# Altium PCB PCB1.PcbDoc
Units mil, origin at the board's own origin, x right, y up, seen from the top; angles counter-clockwise.
Board outline 6000 x 4465 mil, 2 copper layers (Top Layer, Bottom Layer); 52 components, 40 nets, 184 pads, 0 vias.
Unrouted connection lines stored in the file: 5.
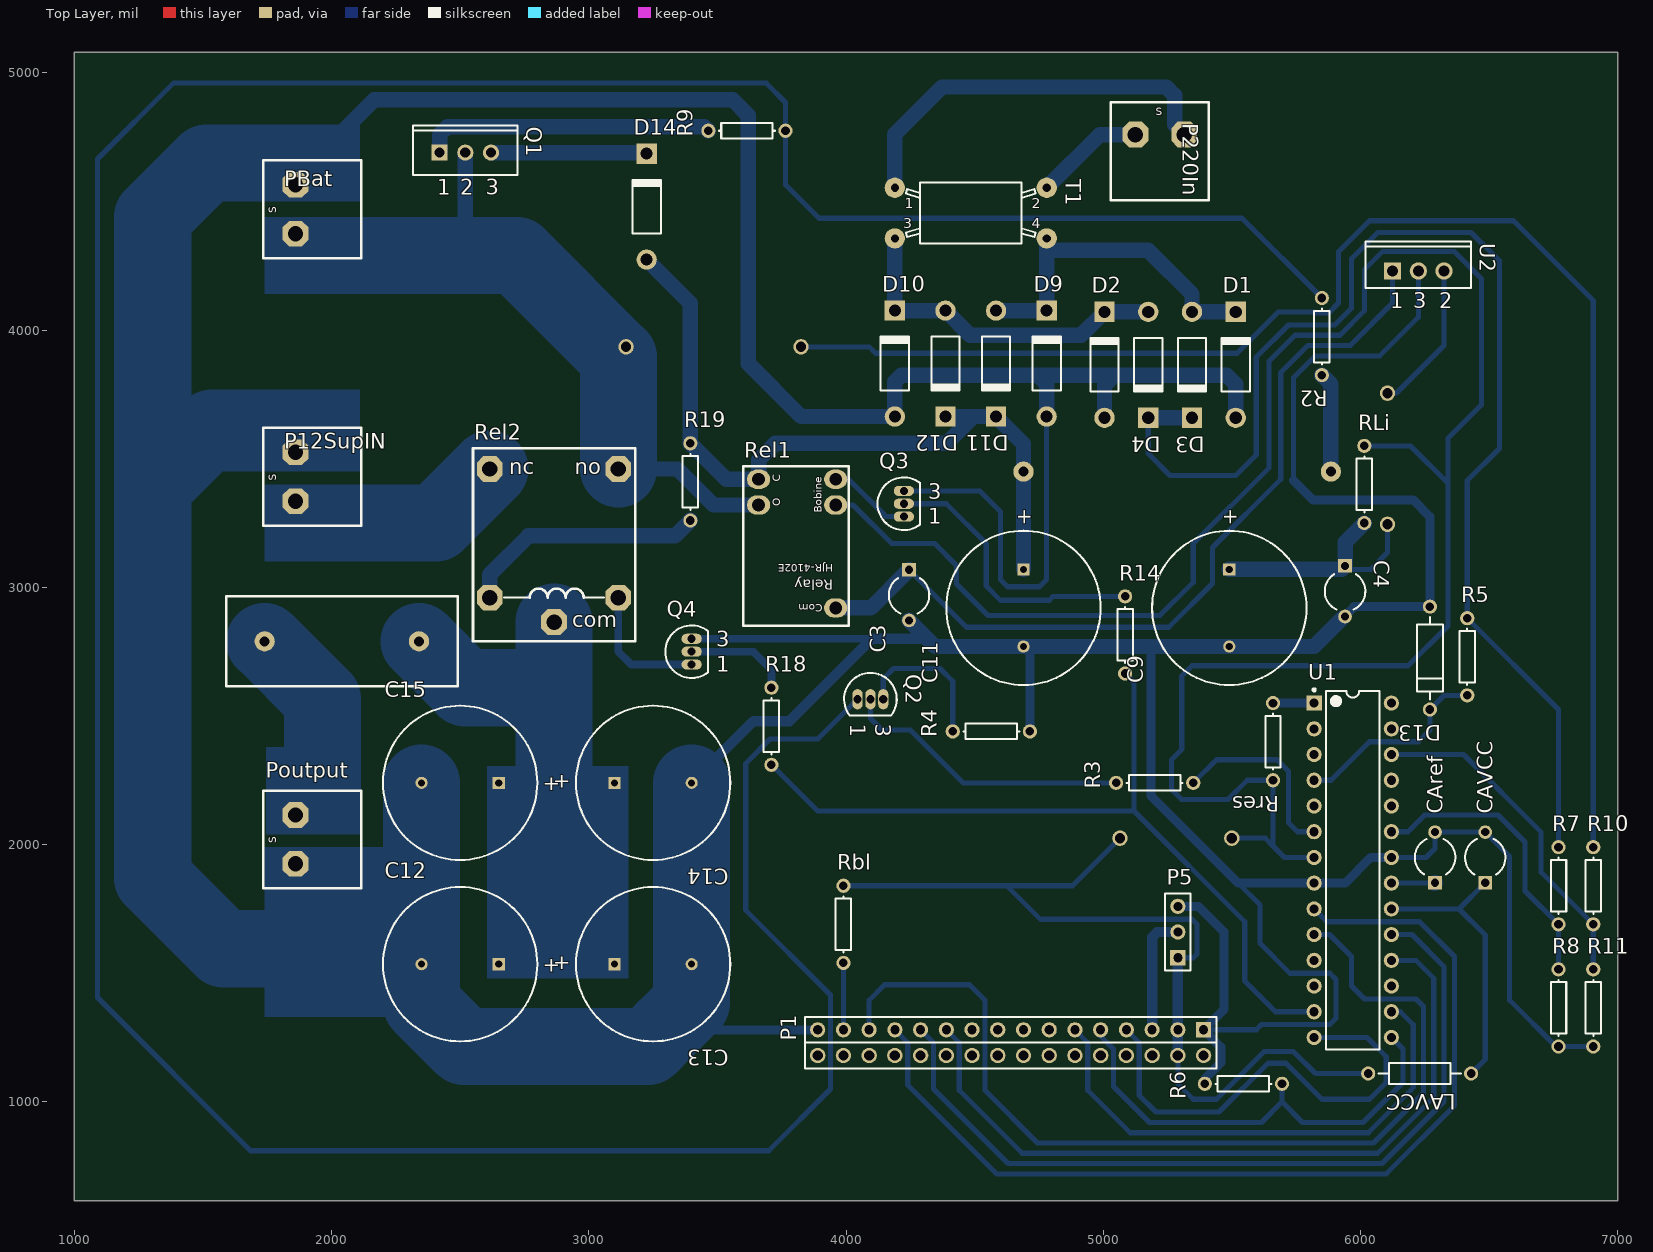
[diagram p0: Top Layer view]
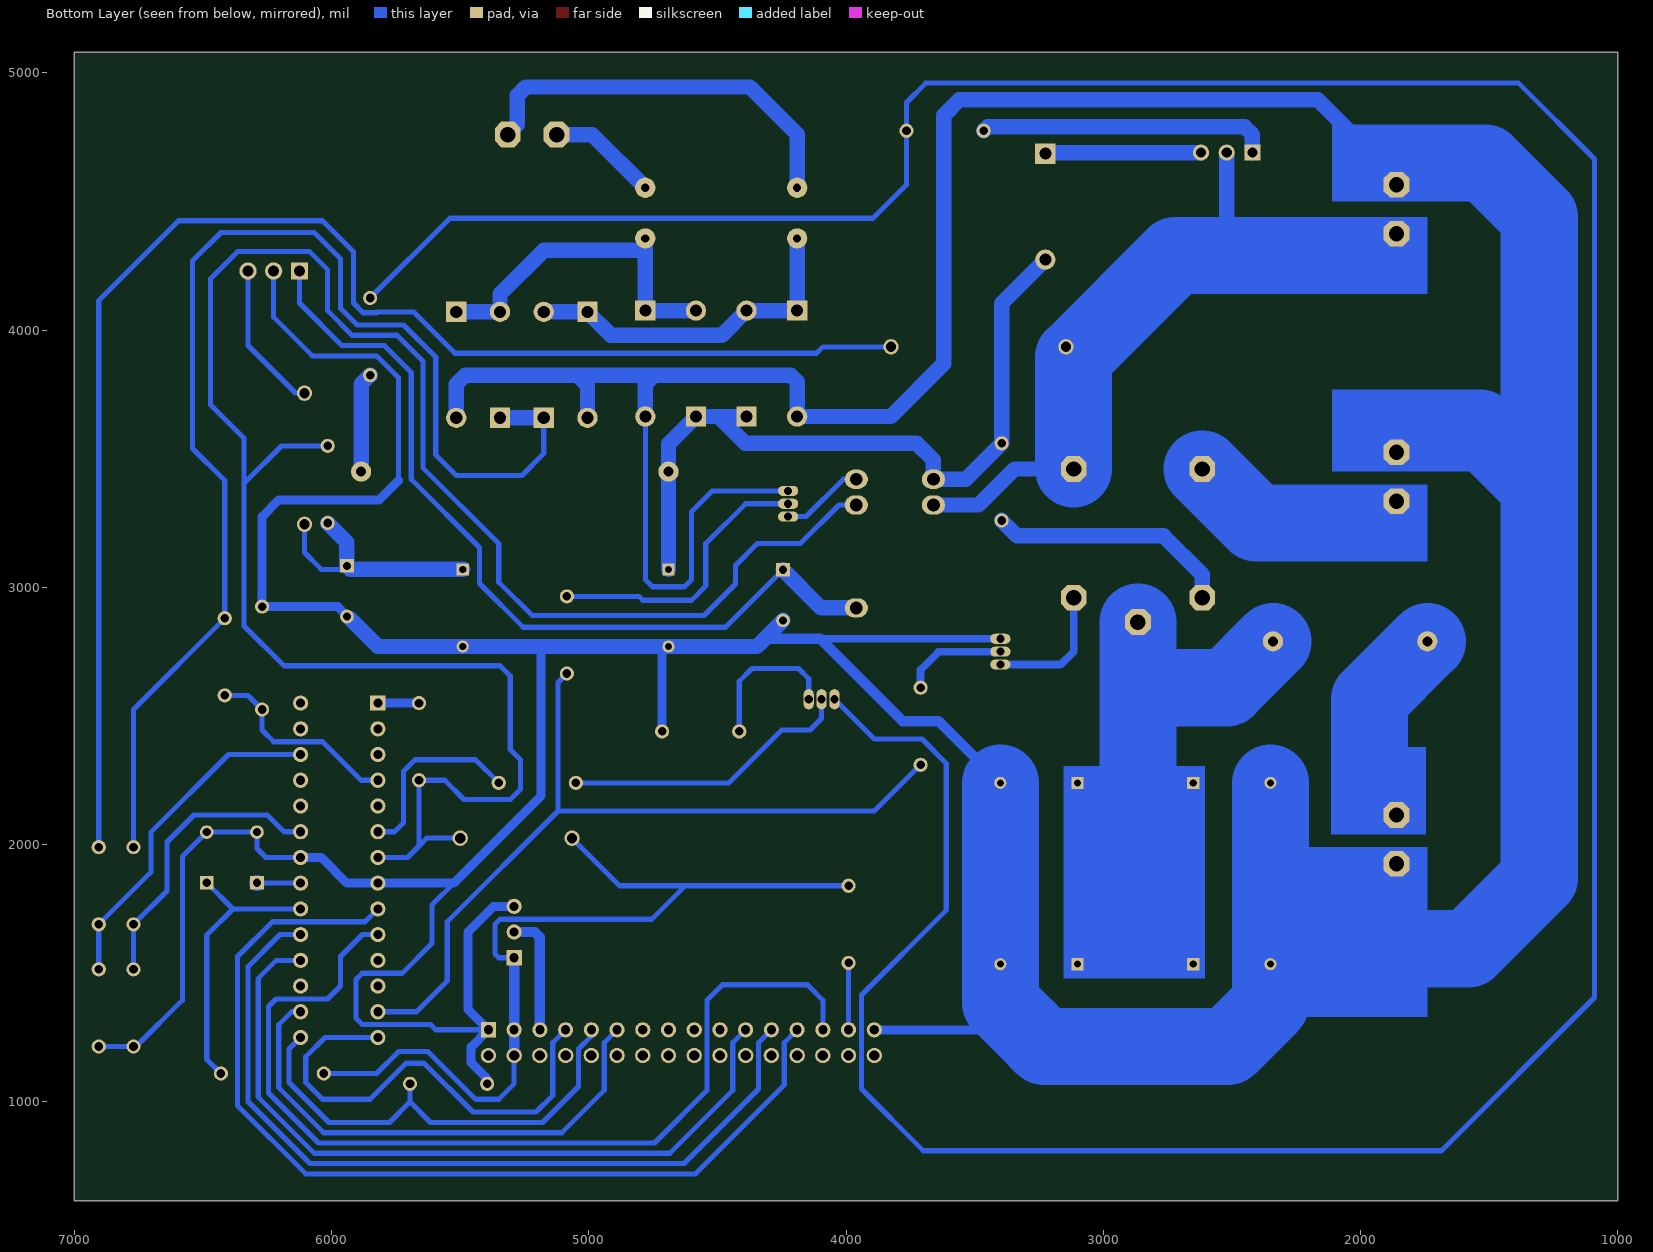
[diagram p1: Bottom Layer view, seen from below]

## Layer stack, top to bottom
Top Layer: signal copper 1.4
Dielectric: dielectric 12.6, FR-4, Dk 4.8
Bottom Layer: signal copper 1.4

## Board outline
1000,615 7000,615 7000,5080 1000,5080

## Design rules (kind name [scope] priority, off if disabled: settings)
Clearance [All] p1: gap=10
PolygonConnect [All] p1: connectstyle=Relief reliefconductorwidth=10 reliefentries=4 polygonreliefangle="90 Angle" airgapwidth=10
RoutingVias [All] p1: holewidth=28 width=50 viastyle="Through Hole" minholewidth=28 minwidth=50 maxholewidth=28 maxwidth=50
SolderMaskExpansion [All] p1: expansion=4
Width [All] p1: maxlimit=300 minlimit=10 preferedwidth=60
28 further rules are at their usual default settings.

## Components (designator, comment, footprint, x,y, rotation, side; value= is the part's Value field where it differs from the comment)
C3 "Cap2" CAPR5-4X5 4245,2970 r270 top
C4 "Cap2" CAPR5-4X5 5940,2985 r270 top
C9 "Cap Pol1" RB7.6-15 5490,2920 r90 top
C11 "Cap Pol1" RB7.6-15 4690,2920 r90 top
C12 "Cap Pol1" RB7.6-15 2500,1535 r0 top
C13 "Cap Pol1" RB7.6-15 3250,1535 r180 top
C14 "Cap Pol1" RB7.6-15 3250,2240 r180 top
C15 "Cap Pol1" RB7.6-15 2500,2240 r0 top
CAref "Cap2" CAPR5-4X5 6290,1950 r90 top
CAVCC "Cap2" CAPR5-4X5 6485,1950 r90 top
D1 "Diode 1N4007" DO-41 5515,3865 r90 top
D2 "Diode 1N4007" DO-41 5005,3865 r90 top
D3 "Diode 1N4007" DO-41 5345,3865 r270 top
D4 "Diode 1N4007" DO-41 5175,3865 r270 top
D9 "Diode 1N4007" DO-41 4780,3870 r90 top
D10 "Diode 1N4007" DO-41 4190,3870 r90 top
D11 "Diode 1N4007" DO-41 4583.33,3870 r270 top
D12 "Diode 1N4007" DO-41 4386.67,3870 r270 top
D13 "D Zener" DIODE-0.4 6270,2725 r270 top
D14 "Diode 1N4007" DO-41 3225,4480 r90 top
LAVCC "Inductor Adj" AXIAL-0.4 6230,1110 r180 top
P1 "Header 16" HDR1X16 5390,1280 r180 top
P5 "ResAdj" HDR1X3 5290,1560 r90 top
P12SupIN "Connector_Screw" "Screw Connector" 1860,3335 r90 top
P220In "Connector_Screw" "Screw Connector" 5125,4760 r0 top
PBat "Connector_Screw" "Screw Connector" 1860,4375 r90 top
Poutput "Connector_Screw" "Screw Connector" 1860,1925 r90 top
Q1 "TIP127" 221A-02 2520,4690 r0 top
Q2 "BC547A" 29-04 4095,2565 r270 top
Q3 "BC547A" 29-04 4225,3325 r0 top
Q4 "BC547A" 29-04 3400,2750 r0 top
R2 "Res1" AXIAL-0.3 5850,3975 r270 top
R3 "Res1" AXIAL-0.3 5200,2240 r180 top
R4 "Res1" AXIAL-0.3 4565,2440 r180 top
R5 "Res1" AXIAL-0.3 6415,2730 r90 top
R6 "Res1" AXIAL-0.3 5545,1070 r180 top
R7 "Res1" AXIAL-0.3 6770,1840 r90 top
R8 "Res1" AXIAL-0.3 6770,1365 r90 top
R9 "Res1" AXIAL-0.3 3615,4775 r180 top
R10 "Res1" AXIAL-0.3 6905,1840 r90 top
R11 "Res1" AXIAL-0.3 6905,1365 r90 top
R14 "Res1" AXIAL-0.3 5085,2815 r90 top
R18 "Res1" AXIAL-0.3 3710,2460 r90 top
R19 "Res1" AXIAL-0.3 3395,3410 r90 top
Rbl "Res1" AXIAL-0.3 3990,1690 r90 top
Rel1 "HJR-4102E" HJR-4102E 3960,2920 r90 top
Rel2 "JZC-22F-12VDC" JZC-22F-12VDC 2615,2960 r0 top
RLi "Res1" AXIAL-0.3 6015,3400 r90 top
Rres "Res1" AXIAL-0.3 5660,2400 r270 top
T1 "Trans" TRANS 4485,4455 r0 top
U1 "ATmega8A-PU" 28P3 5970,1900 r0 top
U2 "L7805ABV" TO220ABN 6225,4230 r0 top

## Footprints (in the part's own frame and the unit in brackets; to place one, negate y for a bottom-side part, rotate by r counter-clockwise, add the part's x,y. Pads: shape width x height; smd on the part's side, far side on the other; paste and mask are expansions set on the pad)
28P3 [mm] "DIP, 28-Leads, Row Spacing 7.62mm, Pitch 2.54mm, Body 34.67x7.3mm"
  rect 1.5x1.5 hole 0.9: 1(-3.81,16.51)
  round 1.5 hole 0.9: 2(-3.81,13.97) 3(-3.81,11.43) 4(-3.81,8.89) 5(-3.81,6.35) 6(-3.81,3.81) 7(-3.81,1.27) 8(-3.81,-1.27) 9(-3.81,-3.81) 10(-3.81,-6.35) 11(-3.81,-8.89) 12(-3.81,-11.43) 13(-3.81,-13.97) 14(-3.81,-16.51) 15(3.81,-16.51) 16(3.81,-13.97) 17(3.81,-11.43) 18(3.81,-8.89) 19(3.81,-6.35) 20(3.81,-3.81) 21(3.81,-1.27) 22(3.81,1.27) 23(3.81,3.81) 24(3.81,6.35) 25(3.81,8.89) 26(3.81,11.43) 27(3.81,13.97) 28(3.81,16.51)
  silkscreen extent -3.93,-17.7 2.65,17.93, body extent -3.6,-17.65 3.6,17.65, height 4.58
29-04 [mm] "TO, Flat Index; 3 In-Line, Axial Leads; Body Dia. 4.8mm; Leads 0.48 x 0.5 mm (max)"
  oval 2x1 hole 0.8: 1(0,-1.27) 2(0,0) 3(0,1.27)
  silkscreen extent -2.6,-2.6 1.6,2.6
221A-02 [mm] "TO, Thru-Hole, Vertical, Heatsink Mounted; 3 In-Line Leads; Pitch 2.54 mm"
  rect 1.6x1.6 hole 1: 1(-2.54,0)
  round 1.6 hole 1: 2(0,0) 3(2.54,0)
  silkscreen extent -5.15,-2.2 5.15,2.7
AXIAL-0.3 [mm] "Axial Device, Thru-Hole; 2 Leads; 0.3 in Pin Spacing"
  round 1.4 hole 0.85: 1(-3.81,0) 2(3.81,0)
  silkscreen extent -2.77,-0.76 2.77,0.76
AXIAL-0.4 [mm] "Axial Device, Thru-Hole; 2 Leads; 0.4 in Pin Spacing"
  round 1.4 hole 0.85: 1(-5.08,0) 2(5.08,0)
  silkscreen extent -4.06,-1.02 4.06,1.02
CAPR5-4X5 [mm] "Capacitor; 2 Leads"
  rect 1.35x1.35 hole 0.8: 1(-2.5,0)
  round 1.35 hole 0.8: 2(2.5,0)
  silkscreen extent -1.69,-2 1.82,2
DIODE-0.4 [mm] "Diode, Thru-Hole; 2 Leads; 0.4 in Pin Spacing"
  round 1.4 hole 0.85: 1(-5.08,0) 2(5.08,0)
  silkscreen extent -4.06,-1.27 4.06,1.27
DO-41 [mm] "Diode, Axial; Body 5.2 x 2.7 mm (LxDia. max), Lead Dia. 0.86 mm (max)"
  round 2 hole 1.2: 1(-5.23,0)
  rect 2x2 hole 1.2: 2(5.23,0)
  silkscreen extent -2.65,-1.41 2.75,1.4
HDR1X3 [mm] "Connector; Header; 3 Position"
  rect 1.5x1.5 hole 0.9: 1(0,0)
  round 1.5 hole 0.9: 2(2.54,0) 3(5.08,0)
  silkscreen extent -1.27,-1.27 6.35,1.27
HDR1X16 [mm] "Connector; Header; 16 Position"
  rect 1.5x1.5 hole 0.9: 1(0,0)
  round 1.5 hole 0.9: 2(2.54,0) 3(5.08,0) 4(7.62,0) 5(10.16,0) 6(12.7,0) 7(15.24,0) 8(17.78,0) 9(20.32,0) 10(22.86,0) 11(25.4,0) 12(27.94,0) 13(30.48,0) 14(33.02,0) 15(35.56,0) 16(38.1,0)
  silkscreen extent -1.27,-1.27 39.37,1.27
HJR-4102E [mil] "Relay"
  oval 75x90 hole 50: 1(400,0) 2(500,0) 3(0,0) 4(500,300) 5(400,300)
  silkscreen extent -70,-50 550,360, body extent -70,-55 550,355, height 473
JZC-22F-12VDC [mil] "Milon 12V Relay"
  oct 100x100 hole 60: 0(0,0) 1(500,0) 2(250,-95) 3(500,500) 4(0,500)
  silkscreen extent -65,-170 565,580, body extent -65,-170 565,580, height 750
RB7.6-15 [mm] "Polarized Capacitor (Radial); 2 Leads"
  rect 1.2x1.2 hole 0.7: 1(3.81,0)
  round 1.2 hole 0.7: 2(-3.81,0)
  silkscreen extent -7.62,-7.62 7.62,7.62
"Screw Connector" [mil]
  oct 100x100 hole 60: 0(0,0) 1(190,0)
  silkscreen extent -95,-255 285,125, body extent -95,-255 285,125, height 500
TO220ABN [mm] "TO, Thru-Hole, Vertical, Heatsink Mounted; 3 In-Line Leads; Pitch 2.54 mm; Pin sequence 1, 3, 2"
  rect 1.7x1.7 hole 1.1: 1(-2.54,0)
  round 1.7 hole 1.1: 2(2.54,0) 3(0,0)
  silkscreen extent -5.2,-1.7 5.2,2.9
TRANS [mm] "Transformer; 4 Leads"
  round 2 hole 0.8: 1(-7.5,2.5) 2(7.5,2.5) 3(-7.5,-2.5) 4(7.5,-2.5)
  silkscreen extent -6.4,-3 6.4,3

## Part data
C3 C4 CAref CAVCC: "Capacitor"
C9 C11 C12 C13 C14 C15: "Polarized Capacitor (Radial)"
D1 D2 D3 D4 D9 D10 D11 D12 D14: "1 Amp General Purpose Rectifier"
D13: "Zener Diode"
LAVCC: "Adjustable Inductor"
P1: "Header, 16-Pin"
P5: library part "Header 3", "Header, 3-Pin"
P12SupIN P220In PBat Poutput: "Screw Connector"
Q1: "Darlington Silicon Power PNP Transistor, 8 Amp, 100 Volts and 65 Watts"
Q2 Q3 Q4: "Amplifier Transistor NPN Silicon"
R2 R3 R4 R5 R6 R7 R8 R9 R10 R11 R14 R18 R19 Rbl RLi Rres: "Resistor"
Rel1: "HJR-4102E 5V Relay"
Rel2: "12V 10A Relay"
T1: "Transformer"
U1: "8-bit AVR Microcontroller, 8KB Flash, 512 Bytes EEPROM, 1KB SRAM, 28-pin PDIP, Industrial Grade (-40°C to 85°C)"
U2: "Precision 1A Regulator"

## Free pads (board coordinates)
  round 78.74 hole 39.37: 0(1740,2790) 0(4690,3450) 1(2340,2790) 1(5885,3450)
  round 60 hole 40: 2(3890,1180) 3(3990,1180) 4(4090,1180) 5(4190,1180) 6(4290,1180) 7(4390,1180) 8(4490,1180) 9(4590,1180) 10(4690,1180) 11(4790,1180) 12(4890,1180) 13(4990,1180) 14(5090,1180) 15(5190,1180) 16(5290,1180) 17(5390,1180) 18(3145,3935) 19(3825,3935) 20(6105,3245) 21(6105,3755) 22(5500,2025) 23(5065,2025)

## Nets (pads, with @x,y where several pads share a name; then routed paths per layer and width w, separated by ;. In a path a pad name is that pad's centre, name@x,y a point inside that pad or via, vN(x,y) a via of type N, cw(c..) or ccw(c..) an arc to the next point about the centre after c; other vN are vias at no path point)
BL+: P1.15 Rbl.1 | length 260
  Bottom Layer w20: P1.15 Rbl.1
D0: P1.11 U1.18 | length 2948.4
  Bottom Layer w20: P1.11 4440,1230 4440,1045 4685,800 6066.86,800 6285,1018.14 6285,1480 6215,1550 U1.18
D1: P1.12 U1.19 | length 3236.1
  Bottom Layer w20: P1.12 4340,1230 4340,1050 4630,760 6083.43,760 6325,1001.57 6325,1525 6200,1650 U1.19
D2: P1.13 U1.9 | length 3815
  Bottom Layer w20: P1.13 4240,1230 4240,1065 4585,720 6100,720 6365,985 6365,1565 6230,1700 5870,1700 U1.9
D3: P1.14 U1.10 | length 3778.9
  Bottom Layer w20: P1.14 4090,1395 4150,1455 4480,1455 4540,1395 4540,1045 4745,840 6050.29,840 6245,1034.71 6245,1370 6215.47,1399.53 6015.47,1399.53 5965,1450 5965,1565 5880,1650 U1.10
GND: C3.2 C4.2 C9.2 C11.2 C12.2 C13.2 C14.2 C15.2 CAref.2 CAVCC.2 D1.1 D2.1 D9.1 D10.1 D13.1 P1.1 P1.16 P5.3 P12SupIN.1 PBat.1 Poutput.0 Q3.3 Q4.3 R4.1 R6.2 R8.1 R11.1 U1.8 U1.22 U2.3 | length 26914.4
  Bottom Layer w20: Q3.3 4520,3375 4600,3295 4600,3030 4627.5,3002.5 4752.5,3002.5 4780,3030 D9.1 ; P1.1 5595,1280 5615.47,1300.47 5880.47,1300.47 5905,1325 5905,1475 5880.47,1499.53 5725.47,1499.53 5610,1615 5610,1765 5525,1850 ; 5740,3415 5740,3815 5825,3900 6075,3900 6225,4050 U2.3 ; U1.22 6255,1950 6290,1985 CAref.2 CAVCC.2 6580,1953.43 6580,1395 6760,1215 R11.1
  Bottom Layer w30: Q4.3 4100,2800
  Bottom Layer w35: 3295,1280 P1.16 ; C11.2 4715,2745 R4.1 ; 5185,2770 5185,2190 5525,1850 U1.8 5940,1850 6040,1950 U1.22 ; P5.3 5370,1760 5470,1660 5470,1360 P1.1 5457.5,1212.5 5457.5,1152.04 5395,1089.54 R6.2 ; 5740,3415 5815,3340 6205,3340 6270,3275 D13.1 5975,2925 C4.2@5930.79,2880.79
  Bottom Layer w40: C14.2 3640,2480 3780,2480 4100,2800 4316.57,2800
  Bottom Layer w60: 1920,4650 2165,4895 3560,4895 3620,4835 3620,3870 3825.91,3664.09 D10.1 4190,3800 4215,3825 4745,3825 ; C3.2 4316.57,2800 4346.57,2770 C11.2 5185,2770 C9.2 5820,2770 C4.2@5930.79,2880.79 ; D9.1 4780,3790 4745,3825 ; D2.1 5005,3785 5045,3825 ; D1.1 5515,3790 5480,3825 4745,3825
  Bottom Layer w300: 1840,3620 1535,3620 1305,3390 ; 1915,1595 1580,1595 1305,1870 1305,3390 ; 1920,4650 1515,4650 1305,4440 1305,3390 ; C15.2 C12.2 2350,1380 2515,1215 3230,1215 3295,1280 3400,1385 C13.2 C14.2
LCDEN: P1.6 U1.16 | length 2012.3
  Bottom Layer w20: P1.6 4940,1230 4940,1045 5105,880 6030,880 6205,1055 6205,1300 6155,1350 U1.16
NetC4_1: C4.1 C9.1 pad.20 pad.21 RLi.1 U2.2 | length 1555.2
  Bottom Layer w20: C4.1@5926.57,3070 6040,3070 6105,3135 pad.20 ; pad.21 6140,3755 6325,3940 U2.2
  Bottom Layer w60: C9.1 5926.57,3070 C4.1 5940,3175 RLi.1
NetCAref_1: CAref.1 U1.21 | length 170.7
  Bottom Layer w20: U1.21 CAref.1@6288.43,1850
  Bottom Layer w60: CAref.1@6288.43,1850 CAref.1
NetCAVCC_1: CAVCC.1 LAVCC.1 U1.20 | length 1111.9
  Bottom Layer w20: U1.20 6383.43,1750 ; LAVCC.1 6485,1165 6485,1648.42 6383.43,1750 ; CAVCC.1 6383.43,1750
NetD3_2: D3.2 D4.2 R5.2 R7.2 | length 4960.4
  Bottom Layer w20: D4.2 5175,3520 5260,3435 5515,3435 5595,3515 5595,3895 5720,4020 5900,4020 5965,4085 5965,4277.43 6067.57,4380 6430,4380 6540,4270 6540,3540 6415,3415 R5.2 6770,2525 R7.2
  Bottom Layer w60: D4.2 D3.2
NetD13_2: D13.2 R5.1 U1.4 | length 778.6
  Bottom Layer w20: U1.4 5885,2250 6035,2400 6225,2400 6270,2445 D13.2 6325,2580 R5.1
NetD14_2: D14.2 Q1.3 | length 606.7
  Bottom Layer w60: Q1.3 3220.91,4690 D14.2
NetQ1_1: Q1.1 R9.2 | length 1133.6
  Bottom Layer w60: Q1.1 2420,4760 2450,4790 3450,4790 R9.2
NetQ2_1: Q2.1 R2.1 R9.1 | length 13811.6
  Bottom Layer w20: Q2.1 3890,2410 3705,2410 3610,2315 3610,1745 3940,1415 3940,1050 3700,810 1685,810 1090,1405 1090,4665 1385,4960 3690,4960 3765,4885 R9.1 3765,4565 3895,4435 5540,4435 R2.1
NetQ2_2: Q2.2 R3.2 | length 1133.6
  Bottom Layer w20: Q2.2 4095,2490 4140,2445 4250,2445 4455,2240 R3.2
NetQ2_3: Q2.3 R4.2 | length 582.3
  Bottom Layer w20: Q2.3 4145,2645 4185,2685 4365,2685 4415,2635 R4.2
NetQ3_1: Q3.1 Rel1.2 | length 325.1
  Bottom Layer w20: Rel1.2 4010,3420 4155,3275 Q3.1
NetQ3_2: Q3.2 R14.2 | length 1118.2
  Bottom Layer w20: Q3.2 4390,3325 4545,3170 4545,3005 4600,2950 4790,2950 4805,2965 R14.2
NetQ4_1: Q4.1 Rel2.1 | length 515.7
  Bottom Layer w30: Rel2.1 3115,2750 3165,2700 Q4.1
NetQ4_2: Q4.2 R18.2 | length 409
  Bottom Layer w30: Q4.2 3640,2750 3710,2680 R18.2
NetR7_1: R7.1 R8.2 U1.23 | length 1139.3
  Bottom Layer w20: U1.23 6185,2050 6250,2115 6535,2115 6640,2010 6640,1820 R7.1 R8.2
NetR10_1: R10.1 R11.2 U1.26 | length 1324.2
  Bottom Layer w20: U1.26 6400,2350 6702.44,2047.56 6702.44,1892.56 R10.1 R11.2
NetR19_1: R19.1 Rel2.0 | length 957
  Bottom Layer w60: Rel2.0 2615,3050 2765,3200 3335,3200 R19.1
NetRres_1: Rres.1 U1.1 | length 160
  Bottom Layer w35: Rres.1 U1.1
RELC: R14.1 R18.1 U1.13 | length 3191.9
  Bottom Layer w20: R18.1 3890,2130 5120,2130 ; R14.1 5120,2630 5120,2130 ; U1.13 5670,1350 5550,1470 5550,1700 5120,2130
RS: P1.4 U1.14 | length 1837.3
  Bottom Layer w20: P1.4 5140,1230 5140,1025 5205,960 5450,960 5640,1150 5710,1150 5850,1010 6035,1010 6100,1075 6100,1175 6025,1250 U1.14
RW: P1.5 R6.1 U1.15 | length 1817.8
  Bottom Layer w20: P1.5 4990,1255 5040,1205 5040,1060 5180,920 5615,920 5695,1000 ; R6.1 5695,1000 ; U1.15 6165,1205 6165,1075 6010,920 5775,920 5695,1000
UPSOUT: C12.1 C13.1 C14.1 C15.1 pad.0@1740,2790 pad.1@2340,2790 Poutput.1 Rel2.2 | length 2282.8
  Bottom Layer w300: pad.0@1740,2790 1965,2565 1965,2190 ; pad.1@2340,2790 2520,2610 2865,2610 ; 2865,1875 2865,2610 ; Rel2.2 2865,2610
V220A: P220In.1 T1.1 | length 1500.4
  Bottom Layer w60: T1.1 4189.72,4761.57 4373.15,4945 5245,4945 5277.5,4912.5 P220In.1@5277.5,4797.5
V220B: P220In.0 T1.2 | length 430.3
  Bottom Layer w60: T1.2 4986.85,4760 P220In.0
VAC12A: D1.2 D3.1 D9.2 D11.1 T1.4 | length 1351.7
  Bottom Layer w40: D9.2 D9.2@4780.28,4076.18
  Bottom Layer w60: D11.1 D9.2 ; D9.2@4780.28,4076.18 4780.28,4310 ; T1.4 4780.28,4310 ; D1.2 D3.1 5345,4140 5175,4310 4780.28,4310
VAC12B: D2.2 D4.1 D10.2 D12.1 T1.3 | length 1343.2
  Bottom Layer w60: T1.3 4189.72,4076.18 D10.2 D12.1 4482.57,3980 4914.09,3980 D2.2 D4.1
VBASE: R3.1 U1.6 | length 740.4
  Bottom Layer w20: R3.1 5440,2330 5675,2330 5720,2285 5720,2085 5755,2050 U1.6
VBAT: pad.18 pad.19 PBat.0 Q1.2 R10.2 Rel1.5 Rel2.3 | length 8351.2
  Bottom Layer w20: pad.19 4090,3935 4115,3910 5520,3910 5680,4070 5823.6,4070 5826.16,4067.44 5877.44,4067.44 5915,4105 5915,4305 6035,4425 6595,4425 6905,4115 R10.2
  Bottom Layer w60: Q1.2 2520,4310 2540,4290 ; Rel2.3 3345,3460 3485,3320 Rel1.5
  Bottom Layer w300: 2050,4290 2540,4290 2720,4290 3115,3895 Rel2.3
VCC: LAVCC.2 P1.2 P5.1 pad.16 pad.22 pad.23 Rbl.2 Rel1.1 RLi.2 Rres.2 U1.7 | length 11711.5
  Bottom Layer w20: Rel1.1 4027.5,3320 4177.5,3170 4345,3170 4430,3085 4430,3012.5 4552.5,2890 5220,2890 5350,3020 5350,3170 5645,3465 5645,3880 5745,3980 5920,3980 6015,4075 6015,4235 6085,4305 6365,4305 6470,4200 6470,3710 6340,3580 6340,3405 ; Rbl.2 4625,1840 ; pad.23 4880,1840 4625,1840 ; pad.16 5290,1070 5350,1010 5440,1010 5625,1195 5740,1195 5825,1110 LAVCC.2 ; P5.1 5350,1560 5365,1575 5365,1690 5345.47,1709.53 4755.47,1709.53 4625,1840 ; pad.22 5630,2025 5660,1995 ; U1.7 5705,1950 5660,1995 ; RLi.2 6195,3550 6340,3405 ; 5660,1995 Rres.2 5560,2250 5485,2175 5305,2175 5265,2215 5265,2330 5305,2370 5305,2655 5345,2695 6185,2695 6340,2850 6340,3405
  Bottom Layer w40: pad.16 P1.2 P5.1
VEE: P1.3 P5.2 | length 468.3
  Bottom Layer w40: P1.3 5190,1640 5210,1660 P5.2
VSBOARD: C3.1 Rel1.3 U2.1 | length 3291
  Bottom Layer w20: C3.1 4468.43,2845 5255,2845 5425,3015 5425,3155 5690,3420 5690,3835 5795,3940 5960,3940 6125,4105 U2.1
  Bottom Layer w60: Rel1.3 4096.57,2920 C3.1
VSUPP12: P12SupIN.0 Rel2.4 | length 537
  Bottom Layer w300: 2165,3250 2405,3250 Rel2.4
VTRANS: C11.1 D11.2 D12.2 D14.1 pad.0@4690,3450 pad.1@5885,3450 R2.2 R19.2 Rel1.4 | length 3312
  Bottom Layer w60: D14.1 3395,4104.09 R19.2 3535,3420 Rel1.4 3660,3495 3725,3560 4390.91,3560 4495,3664.09 ; D12.2 4495,3664.09 ; C11.1 4690,3557.43 D11.2 4495,3664.09 ; R2.2 5885,3790 pad.1@5885,3450
pads on no net: P1.7 P1.8 P1.9 P1.10 U1.2 U1.3 U1.5 U1.11 U1.12 U1.17 U1.24 U1.25 U1.27 U1.28

## Other copper
Bottom Layer:
  rectangle net UPSOUT: 2605,1480 3155,2305
  rectangle net GND: 1740,1330 2350,1990
  rectangle net UPSOUT: 1745,2040 2115,2380
  rectangle net GND: 1575,3450 2110,3770
  rectangle net VSUPP12: 1740,3100 2350,3400
  rectangle net VBAT: 1740,4140 2300,4440
  rectangle net GND: 1740,4500 2110,4800

## Silkscreen, mask and mechanical layers (free items; w line width, h text height)
Top Overlay:
  lines w8: 3840,1230 3840,1130 5440,1130 5440,1230
  lines w10: 1590,2615 1590,2965 2490,2965 2490,2615 1590,2615

## Text inside footprints (layer, text, board x,y; h text height)
C9: Top Overlay "+" at 5519.01,3240.15 h59.06 r90
C11: Top Overlay "+" at 4719.01,3240.15 h59.06 r90
C12: Top Overlay "+" at 2820.15,1505.99 h59.06
C13: Top Overlay "+" at 2929.85,1564.01 h59.06 r180
C14: Top Overlay "+" at 2929.85,2269.01 h59.06 r180
C15: Top Overlay "+" at 2820.15,2210.99 h59.06
P12SupIN: Top Overlay "S" at 1785,3415 h30 r90
P220In: Top Overlay "S" at 5205,4835 h30
PBat: Top Overlay "S" at 1785,4455 h30 r90
Poutput: Top Overlay "S" at 1785,2005 h30 r90
Q1: Top Overlay "3" at 2600.32,4525.63 h59.06; Top Overlay "2" at 2500.32,4525.63 h59.06; Top Overlay "1" at 2410.16,4525.63 h59.06
Q2: Top Overlay "1" at 4017.09,2469.68 h59.05 r270; Top Overlay "3" at 4113.39,2469.68 h59.05 r270
Q3: Top Overlay "1" at 4320.31,3247.09 h59.05; Top Overlay "3" at 4320.31,3343.39 h59.05
Q4: Top Overlay "1" at 3495.32,2672.09 h59.05; Top Overlay "3" at 3495.32,2768.39 h59.05
Rel1: Top Overlay "Relay" at 3950,3030 h40 r180; Top Overlay "C" at 3745,3410 h30 r90; Top Overlay "O" at 3745,3315 h30 r90; Top Overlay "Com" at 3910,2935 h30 r180; Top Overlay "Bobine" at 3905,3290 h30 r90
Rel2: Top Overlay "no" at 2945,3440 h59.06; Top Overlay "nc" at 2690,3440 h59.06; Top Overlay "com" at 2935,2845 h59.06
T1: Top Overlay "4" at 4721.22,4395.94 h39.37; Top Overlay "3" at 4222.2,4395.94 h39.37; Top Overlay "2" at 4721.22,4474.69 h39.37; Top Overlay "1" at 4229.09,4474.69 h39.37
U2: Top Overlay "3" at 6205.31,4085.32 h59.06; Top Overlay "2" at 6305.32,4085.32 h59.06; Top Overlay "1" at 6115.16,4085.31 h59.06